# Altium PCB dc_power_module_v1.PcbDoc (part 1 of 4)
Units mm, origin at the board's own origin, x right, y up, seen from the top; angles counter-clockwise.
Board outline 83.82 x 73.41 mm, 2 copper layers (Top Layer, Bottom Layer); 37 components, 20 nets, 131 pads, 21 vias.
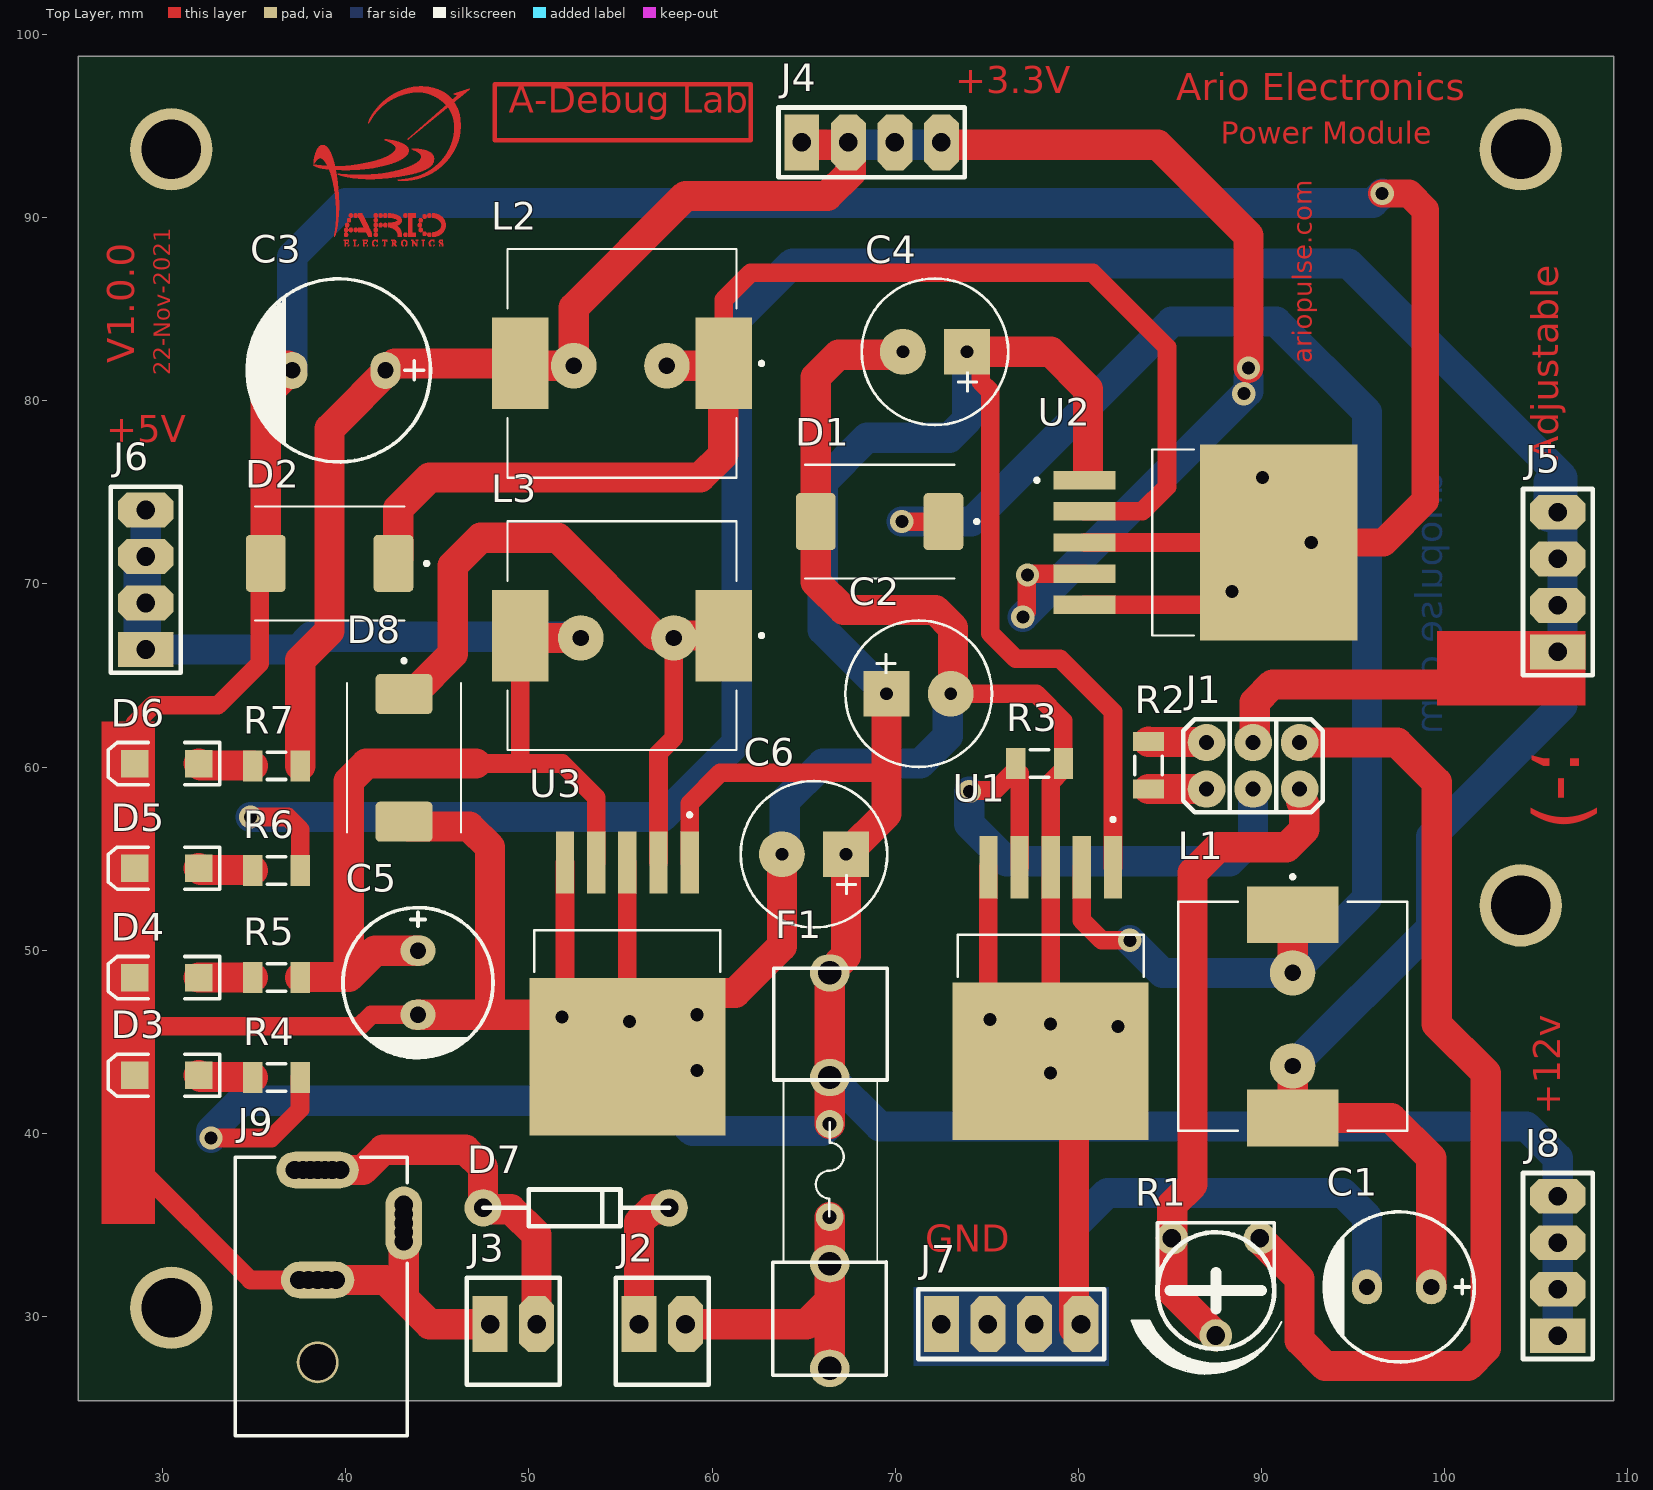
[diagram p0: Top Layer view]
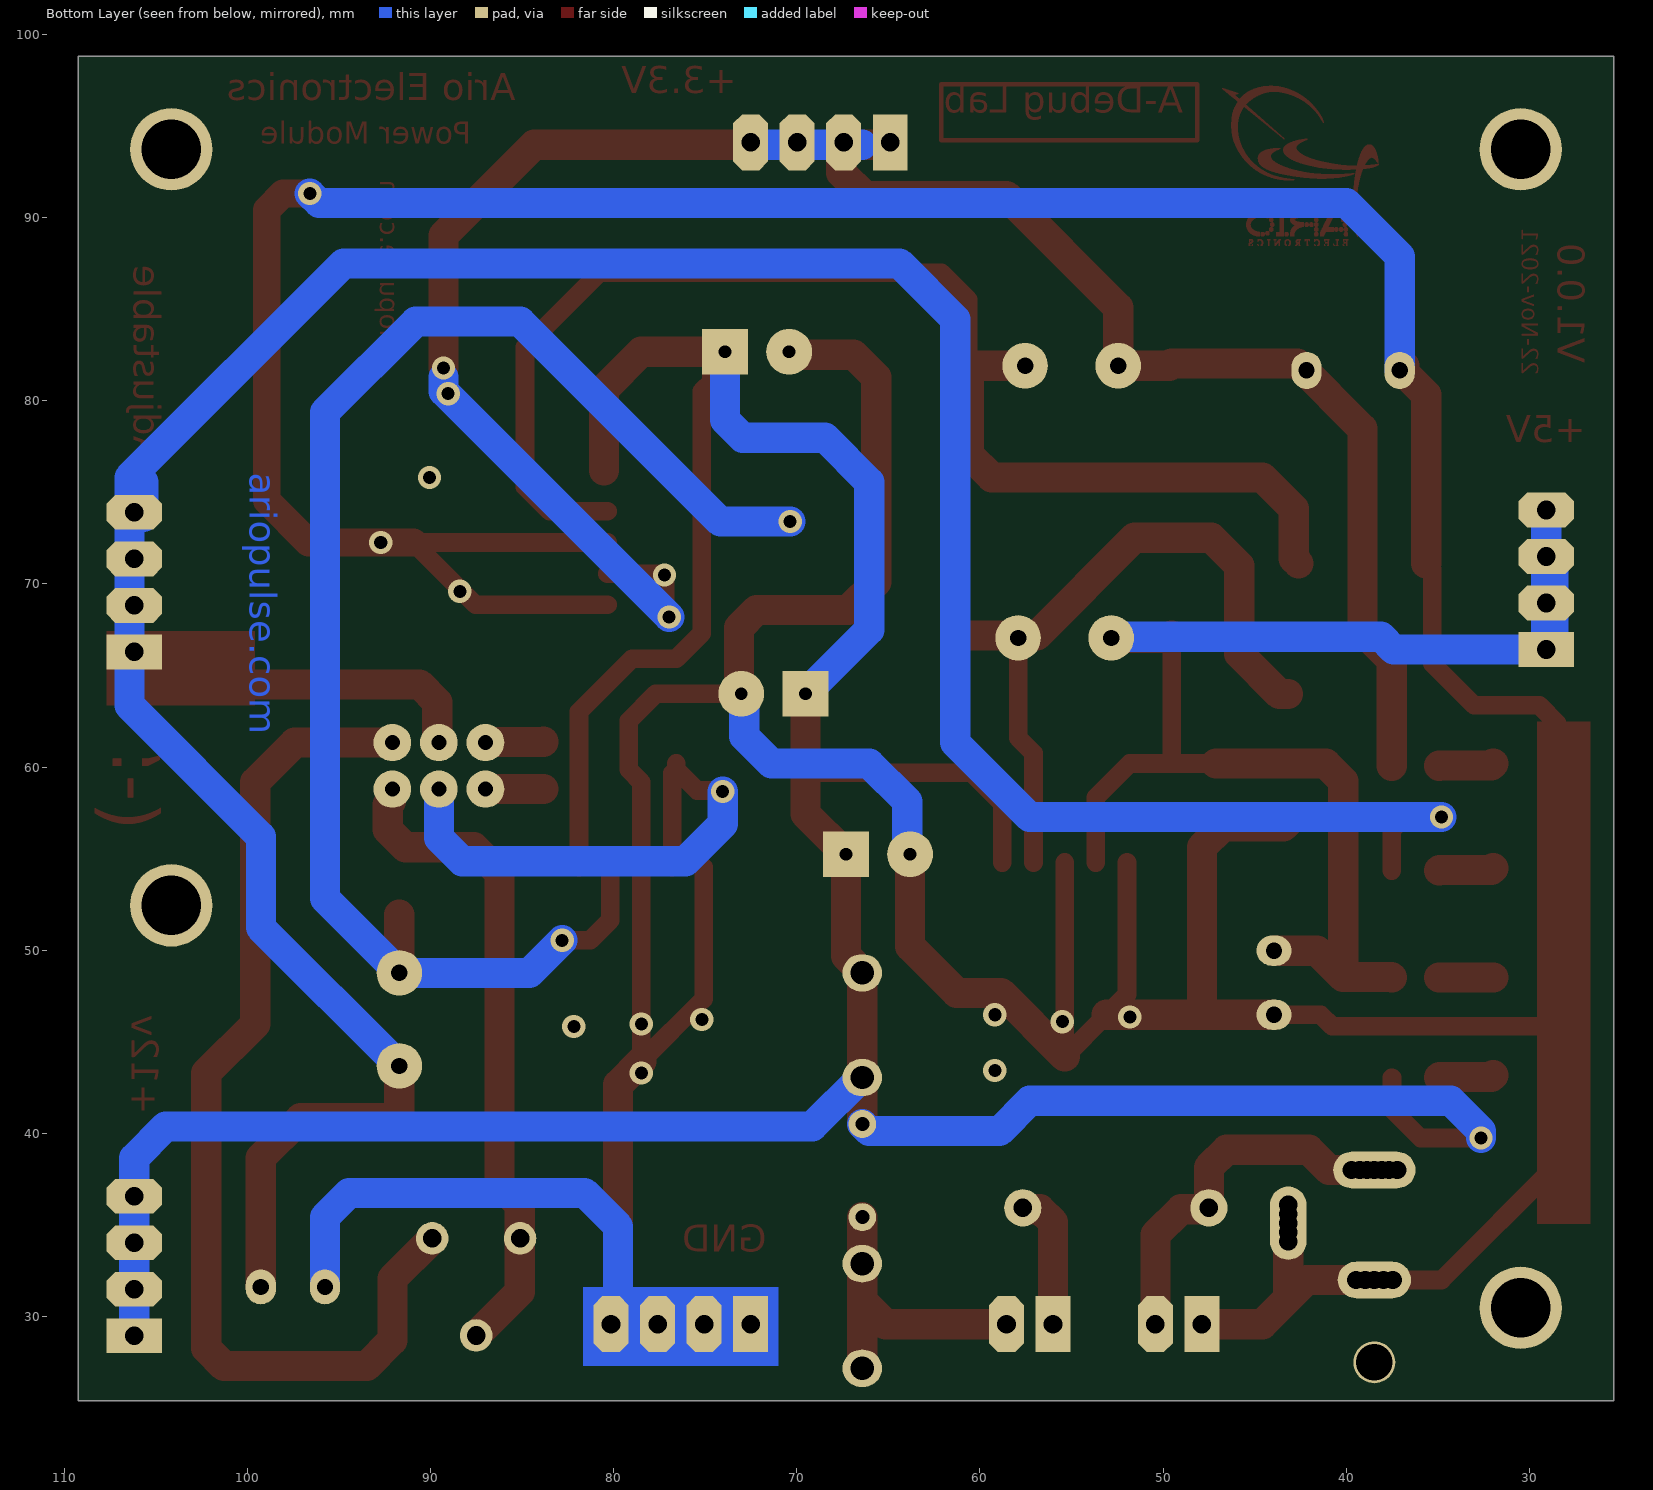
[diagram p1: Bottom Layer view, seen from below]

## Layer stack, top to bottom
Top Solder: solder mask 0.0102, Solder Resist, Dk 3.5
Top Layer: signal copper 0.0356
Dielectric 1: dielectric 0.32, FR-4, Dk 4.8
Bottom Layer: signal copper 0.0356
Bottom Solder: solder mask 0.0102, Solder Resist, Dk 3.5

## Board outline
25.4,25.4 25.4,98.806 109.22,98.806 109.22,25.4

## Design rules (kind name [scope] priority, off if disabled: settings)
Clearance [All] p1: gap=0.381 ignorepadtopadclearanceinfootprint=FALSE except(0: Arc-Hole Track-Hole SMDPad-Hole THPad-Hole Via-Hole Fill-Hole Poly-Hole Region-Hole Text-Hole; 0.254: Arc-Arc Arc-Track Arc-SMDPad Track-Track Track-SMDPad SMDPad-SMDPad)
PolygonConnect [All] p1: connectstyle=Relief reliefconductorwidth=0.254 reliefentries=4 polygonreliefangle="90 Angle" airgapwidth=0.254
RoutingVias [All] p1: holewidth=0.711 width=1.27 viastyle="Through Hole" minholewidth=0.711 minwidth=1.27 maxholewidth=0.711 maxwidth=1.27
SolderMaskExpansion [All] p1: expansion=0.102 istentingtop=FALSE
Width [All] p1: maxlimit=1.651 minlimit=1.016 preferedwidth=1.651 toplayer_prefwidth=1.016 bottomlayer_minwidth=1.651 minimp=50.000000 maximp=50.000000 favimp=50.000000
30 further rules are at their usual default settings.

## Classes and differential pairs
component class dc_power_module_v1: C1 C2 C3 C4 C5 C6 D1 D2 D3 D4 D5 D6 D7 D8 F1 J1 J2 J3 L1 L2 L3 R1 R2 R3 R4 R5 R6 R7 U1 U2 U3

## Components (designator, comment, footprint, x,y, rotation, side; value= is the part's Value field where it differs from the comment)
C1 "Cap Pol2" "Cap 03" 97.508,31.623 r0 top value=680uF
C2 "Cap Pol2" "Cap - 470uF" 73.025,64.008 r180 top value=100uF
C3 "Cap Pol2" "Cap 04" 39.624,81.661 r0 top value=1000uF
C4 "Cap Pol2" "Cap - 470uF" 70.414,82.677 r0 top value=100uF
C5 "Cap Pol2" "Cap 03" 43.942,48.232 r90 top value=680uF
C6 "Cap Pol2" "Cap - 470uF" 63.81,55.245 r0 top value=100uF
D1 "SS34" DIOM7959X262N 69.144,73.406 r180 top
D2 "SS34" DIOM7959X262N 39.116,71.12 r180 top
D3 "LED1" "LED SMD 1206" 30.226,43.18 r180 top
D4 "LED1" "LED SMD 1206" 30.226,48.514 r180 top
D5 "LED1" "LED SMD 1206" 30.226,54.483 r180 top
D6 "LED1" "LED SMD 1206" 30.226,60.198 r180 top
D7 "1n4007" DIODE_4001 47.498,35.941 r0 top
D8 "SS34" DIOM7959X262N 43.18,60.508 r270 top
F1 "FUSE" "Fuse - Complex" 66.421,37.973 r90 top
J1 "JUMPER6" JUMP6 86.995,58.801 r90 top
J2 "KEY" SIP2 56.007,29.591 r0 top
J3 "INPUT" SIP2 47.879,29.591 r0 top
J4 "Comment" SIP4 64.897,94.107 r0 top
J5 "Comment" SIP4 106.172,66.294 r90 top
J6 "Comment" SIP4 29.083,66.421 r90 top
J7 "Comment" SIP4 72.517,29.591 r0 top
J8 "Comment" SIP4 106.172,28.956 r90 top
J9 "Comment" "Power Jack" 38.465,23.504 r90 top
L1 "68uH" *IND_SRP1265A-330M 91.694,46.393 r270 top
L2 "68uH" *IND_SRP1265A-330M 55.08,82.042 r180 top
L3 "68uH" *IND_SRP1265A-330M 55.08,67.183 r180 top
R1 "POT" "Pot 00" 87.503,31.623 r180 top value=50K
R2 "Res-1206" "RES 1206" 83.82,58.801 r90 top value=2.7K
R3 "Res-1206" "RES 1206" 79.177,60.198 r180 top value=1.2K
R4 "Res-1206" "RES 1206" 34.925,43.053 r0 top value=560
R5 "Res-1206" "RES 1206" 34.925,48.514 r0 top value=220K
R6 "Res-1206" "RES 1206" 34.925,54.356 r0 top value=180K
R7 "Res-1206" "RES 1206" 34.925,60.071 r0 top value=100
U1 "LM2576-ADJ" VREG_TPS79625KTTR 78.486,43.942 r270 top
U2 "LM2576-3.3" VREG_TPS79625KTTR 90.932,72.263 r0 top
U3 "LM2576-3.3" VREG_TPS79625KTTR 55.372,44.196 r270 top

## Footprints (in the part's own frame and the unit in brackets; to place one, negate y for a bottom-side part, rotate by r counter-clockwise, add the part's x,y. Pads: shape width x height; smd on the part's side, far side on the other; paste and mask are expansions set on the pad)
*IND_SRP1265A-330M [mm]
  rect 3.1x5 smd: 1(-5.55,0) 2(5.55,0)
  silkscreen extent -7.72,-6.25 6.25,6.25
"Cap 03" [mil]
  oval 65x75 hole 35: 1(68.9,0) 2(-68.9,0)
  silkscreen extent -161,-161 161,161, body extent -159,-159 157,158, height 473
"Cap 04" [mil]
  oval 65x80 hole 35: 1(100,0) 2(-100,0)
  silkscreen extent -197,-197 197,197, body extent -198,-197 198,199, height 513
"Cap - 470uF" [mm]
  rect 2.5x2.5 hole 0.7: 1(3.5,0)
  round 2.5 hole 0.7: 2(0,0)
  silkscreen extent -2.25,-4 5.75,4
DIODE_4001 [mil]
  round 80 hole 40: 1(0,0) 2(400,0)
  silkscreen extent 0,-39 400,39
DIOM7959X262N [mm]
  rrect23% 2.18x3.12 smd: A(3.485,0) C(-3.485,0)
  silkscreen extent -5.4,-3.11 4.07,3.11
"Fuse - Complex" [mil]
  oval 80x85 hole 50: 1(-425,0) 1(-200,0) 2(200,0) 2(425,0)
  round 60 hole 30: 1(-100,0) 2(100,0)
  silkscreen extent -440,-124 435,123, body extent -434,-121 436,125, height 378
JUMP6 [mil]
  oval 80x81 hole 32: 1(0,0) 2(100,0) 3(0,-100) 4(100,-100) 5(0,-200) 6(100,-200)
  silkscreen extent -50,-250 150,50
"LED SMD 1206" [mm]
  rect 1.5x1.5 smd: 1(-1.75,0) 2(1.75,0)
  silkscreen extent -2.9,-1.15 3.2,1.15, body extent -1.65,-0.76 1.65,0.69, height 1.36
"Pot 00" [mil]
  round 70 hole 40: 1(-94.49,-104.33) 2(94.49,-104.33) 3(0,104.33)
  silkscreen extent -141,-138 181,187, body extent -125,-144 127,145, height 183
"Power Jack" [mm] "Power Adaptor Jack"
  round 1.5 hole 1: 1(14.5,-1.25) 1(14.5,-0.8) 1(14.5,-0.4) 1(14.5,0.4) 1(14.5,0.8) 1(14.5,1.25) 2(8.5,-1) 2(8.5,1) 2(8.5,-0.5) 2(8.5,0.5) 3(10.6,-4.7) 3(11.1,-4.7) 3(12.1,-4.7) 3(12.6,-4.7)
  oval 2x4.5 hole 1: 1(14.5,0)
  oval 2x4 hole 1: 2(8.5,0)
  oval 4x2 hole 1: 3(11.6,-4.7)
  round 2.286 hole 2: MH(4,0)
  silkscreen extent 0,-4.9 15.2,4.5, body extent 0,-4.9 15.2,4.5, height 11
"RES 1206" [mm] "Chip Resistor, 2-Leads, Body 3.2x1.6mm, IPC High Density _ (0.125 W)"
  rect 1.05x1.7 smd: 1(0,0) 2(2.596,0)
  silkscreen extent 0.8,-0.75 1.8,0.75, body extent -0.23,-0.76 2.82,0.76, height 0.6
SIP2 [mil]
  rect 75x120 hole 40: 1(0,0)
  oct 75x120 hole 40: 2(100,0)
  silkscreen extent -50,-130 150,100
SIP4 [mil]
  rect 75x120 hole 40: 1(0,0)
  oct 75x120 hole 40: 2(100,0) 3(200,0) 4(300,0)
  silkscreen extent -50,-75 350,75
VREG_TPS79625KTTR [mm]
  rect 3.4x1 smd paste-3 mask+0: 1(-10.6,3.4) 2(-10.6,1.7) 3(-10.6,0) 4(-10.6,-1.7) 5(-10.6,-3.4)
  rect 8.6x10.7 smd paste-6 mask+0: 6(0,0)
  silkscreen extent -13.3,-5.08 -4.62,5.08

## Part data
C1 C2 C3 C4 C5 C6: "Polarized Capacitor (Axial)", LatestRevisionDate=17-Jul-2002, LatestRevisionNote="Re-released for DXP Platform.", PackageDescription="Polarized Capacitor; 2 Leads", PackageReference=POLAR0.8, Published=8-Jun-2000, Publisher="Altium Limited"
D1 D2 D8: library part SS34-E3/57T, "Diode Schottky 40V 3A Surface Mount DO-214AB _SMC_", Package="DO-214 Vishay", Availability=Unavailable, MF=Vishay, MP=SS34-E3/57T, Price=None, SnapEDA_Link=https://www.snapeda.com/parts/SS34-E3/57T/Vishay%20Semiconductor%20Diodes%20Division/view-part/104253/?ref=snap
D3 D4 D5 D6: "Typical RED GaAs LED", LatestRevisionDate=08-Jul-2005, LatestRevisionNote="Mech Layer 1 removed.", PackageDescription="LED; 2 Leads", PackageReference=LED-1, Published=8-Jun-2000, Publisher="Altium Limited"
D7: library part DIOD, "Rectifire Diode"
J1: "Ju,per & dip Switch"
J2 J3: library part 2PIN
L1 L2 L3: library part SRP1265A-330M, "Inductor Power Shielded Wirewound 33uH 20% 100KHz Carbonyl Powder 8A 58mOhm DCR Automotive T/R", Package="1008 Bourns", Availability=Unavailable, MF=Bourns, MP=SRP1265A-330M, Price=None, SnapEDA_Link=https://www.snapeda.com/parts/SRP1265A-330M/Bourns/view-part/?ref=snap
R1: library part RPot, "Volume Potentiometer", LatestRevisionDate=17-Jul-2002, LatestRevisionNote="Re-released for DXP Platform.", PackageDescription="Variable Resistor, Thru-Hole; 3 Leads", PackageReference=VR5, Published=8-Jun-2000, Publisher="Altium Limited", Set Position=0.5, Sim Note="Enter the Resistance value and the set point into parameter fields."
R2 R3 R4 R5 R6 R7: "Resistor", LatestRevisionDate=17-Jul-2002, LatestRevisionNote="Re-released for DXP Platform.", PackageDescription="Axial Device, Thru-Hole; 2 Leads; 0.3 in Pin Spacing", PackageReference=AXIAL-0.3, Published=8-Jun-2000, Publisher="Altium Limited"
U1 U2 U3: library part LM2576HVS-ADJ/NOPB, "SWITCHER Ø³Ø§Ø¯Ù‡ Ùˆ regØ› ØªÙ†Ø¸ÛŒÙ… Ú©Ù†Ù†Ø¯Ù‡ Ú¯Ø§Ù… Ø¨Ù‡ Ù¾Ø§ÛŒÛŒÙ† ØªØ¹Ø¯Ø§Ø¯ 4 ÙˆÙ„Øª ØªØ§ 60 ÙˆÙ„Øª ØŒ 3A Ú©Ù… Ú©Ø§Ù…Ù¾ÙˆÙ†Ù†Øª 5-DDPAK / TO-263 -40 ØªØ§ 125", Package="TO-263-5 Texas Instruments", Availability=Unavailable, BuyPart=https://www.snapeda.com/parts/LM2576HVS-ADJ/NOPB/Texas%20Instruments/view-part/213619/?ref=eda, MF="Texas Instruments", MP=LM2576HVS-ADJ/NOPB, Price=None, SnapEDA_Link=https://www.snapeda.com/parts/LM2576HVS-ADJ/NOPB/Texas%20Instruments/view-part/213619/?ref=snap, Texas_Instruments-Purchase-URL=https://snapeda.com/shop?store=Texas+Instruments&id=213619

## Free pads (board coordinates)
  round 4.5 hole 3.25: 0(30.48,30.48) 0(30.48,93.726) 0(104.14,52.451) 0(104.14,93.726)
  round 2.489 hole 0.889: 6(52.451,81.915) 6(52.832,67.056) 6(91.694,43.688) 7(57.531,81.915) 7(57.912,67.056) 7(91.694,48.768)

## Via types
v1: diameter 1.27, hole 0.711, Top Layer to Bottom Layer, 21 vias

## Nets (pads, with @x,y where several pads share a name; then routed paths per layer and width w, separated by ;. In a path a pad name is that pad's centre, name@x,y a point inside that pad or via, vN(x,y) a via of type N, cw(c..) or ccw(c..) an arc to the next point about the centre after c; other vN are vias at no path point)
+3.3V: C3.1 J4.1 J4.2 J4.3 J4.4 L2.2 pad.6@52.451,81.915 R7.2 U2.4 | length 113.5
  Top Layer w1.016: v1(76.962,68.199) 76.962,68.268 77.167,68.473 77.167,70.436 v1(77.216,70.485) 77.294,70.563 U2.4@80.332,70.563
  Top Layer w1.651: R7.2@37.521,60.071 37.521,65.842 39.116,67.437 39.116,78.486 42.672,82.042 L2.2@49.53,82.042 49.657,81.915 pad.6@52.451,81.915 52.451,85.09 58.547,91.186 66.294,91.186 67.564,92.456 67.564,93.98 J4.2@67.437,94.107 ; J4.1@64.897,94.107 64.897,93.98 66.421,93.98 ; J4.4@72.517,93.98 84.328,93.98 89.281,89.027 v1(89.281,81.788)
  Bottom Layer w1.651: 66.421,93.98 71.501,93.98 ; v1(76.962,68.199) 89.281,80.518 v1@89.281,81.28
  other v1: 89.027,80.391
+5V: C5.1 J6.1 J6.2 J6.3 J6.4 L3.2 pad.6@52.832,67.056 R5.2 U3.4 | length 81.5
  Top Layer w1.016: 47.117,60.198 49.53,60.198 ; L3.2@49.53,67.183 49.53,60.198 ; U3.4@53.672,54.796 53.672,58.342 51.816,60.198 49.53,60.198
  Top Layer w1.651: R5.2@37.521,48.514 37.546,48.539 40.157,48.539 ; C5.1@43.942,49.982 41.6,49.982 40.157,48.539 ; 47.117,60.198 41.124,60.198 40.157,59.231 40.157,48.539 ; L3.2@49.53,67.183 49.657,67.056 pad.6@52.832,67.056
  Bottom Layer w1.651: J6.1@28.702,67.183 J6.2@28.702,68.961 ; J6.2@28.702,69.723 J6.3@28.702,71.501 ; J6.4@29.083,74.041 J6.3@29.083,71.501 J6.2@29.083,68.961 J6.1@29.083,66.421 37.401,66.421 38.1,67.12 52.768,67.12 pad.6@52.832,67.056
+12V: C2.1 C4.1 C6.1 F1.2 J8.1 J8.2 J8.3 J8.4 R4.2 U1.1 U2.1 U3.1 | length 204.5
  Top Layer w1.016: v1(32.639,39.751) 35.941,39.751 37.504,41.314 37.504,43.036 R4.2@37.521,43.053 ; U3.1@58.772,54.796 58.78,54.804 58.78,58.018 60.452,59.69 69.525,59.69 ; C4.1@73.914,82.677 74.656,81.935 74.656,81.046 75.184,80.518 75.184,67.31 76.581,65.913 78.994,65.913 81.886,63.021 U1.1@81.886,54.542
  Top Layer w1.651: F1.2@66.421,40.513 F1.2@66.421,43.053 F1.2@66.421,48.768 66.421,48.808 67.31,49.697 C6.1@67.31,55.245 69.525,57.46 69.525,59.69 C2.1@69.525,64.008 ; C4.1@73.914,82.677 78.486,82.677 80.518,80.645 80.518,76.2
  Bottom Layer w1.651: v1(32.639,39.751) 32.639,40.132 34.29,41.783 57.277,41.783 58.928,40.132 66.04,40.132 F1.2@66.421,40.513 ; F1.2@66.421,43.053 66.484,43.053 69.151,40.386 104.443,40.386 106.172,38.657 J8.4@106.172,36.576 J8.3@106.172,34.036 J8.2@106.172,31.496 J8.1@106.172,28.956 ; C2.1@69.525,64.008 66.04,67.493 66.04,75.565 68.453,77.978 72.947,77.978 73.914,78.945 C4.1@73.914,82.677 ; J8.1@105.664,28.829 J8.1@105.664,28.956
GND: C1.2 C2.2 C3.2 C4.2 C5.2 C6.2 D1.A D2.A D3.2 D4.2 D5.2 D6.2 D8.A J3.1 J7.1 J7.2 J7.3 J7.4 J9.2 J9.3 R3.1 U1.3 U1.5 U1.6 U2.3 U2.5 U2.6 U3.3 U3.5 U3.6 | length 402.8
  Top Layer w1.016: D3.2@28.476,43.18 28.476,38.326 34.798,32.004 J9.2@37.465,32.004 ; 28.476,45.974 28.603,45.847 40.767,45.847 41.402,46.482 C5.2@43.942,46.482 ; D6.2@28.476,60.198 28.476,62.385 29.464,63.373 33.02,63.373 35.306,65.659 35.306,70.795 D2.A@35.631,71.12 ; U3.5@51.972,54.796 51.972,47.596 53.086,46.482 U3.6@55.372,44.196 U3.3@55.372,54.796 ; C2.2@73.025,64.008 77.693,64.008 79.177,62.524 R3.1@79.177,60.198 79.177,59.873 78.486,59.182 U1.3@78.486,54.542 U1.6@78.486,43.942 75.086,47.342 U1.5@75.086,54.542 ; U2.5@80.332,68.863 87.532,68.863 U2.6@90.932,72.263 U2.3@80.332,72.263
  Top Layer w1.524: U2.6@90.932,72.263 96.647,72.263 98.933,74.549 98.933,90.42 98.04,91.313 v1(96.582,91.313)
  Top Layer w1.651: D3.2@28.476,43.18 28.476,45.974 D4.2@28.476,48.514 D5.2@28.476,54.483 D6.2@28.476,60.198 ; D2.A@35.631,71.12 35.631,80.335 36.957,81.661 36.957,81.788 C3.2@36.83,81.915 ; J9.2@37.465,32.004 J9.2@38.465,32.004 J9.2@39.465,32.004 42.164,32.004 43.165,31.003 ; J9.3@43.165,35.604 J9.3@43.165,35.104 J9.3@43.165,34.604 J9.3@43.165,34.104 43.165,31.003 ; D8.A@43.18,57.023 43.445,56.758 46.747,56.758 47.879,55.626 47.879,46.482 ; C5.2@43.942,46.482 47.879,46.482 ; J3.1@47.879,29.591 44.577,29.591 43.165,31.003 ; U3.6@53.086,46.482 47.879,46.482 ; U3.6@55.372,44.196 58.847,47.671 61.26,47.671 63.81,50.221 C6.2@63.81,55.245 ; C4.2@70.414,82.677 70.252,82.515 66.894,82.515 65.659,81.28 D1.A@65.659,73.406 65.659,70.104 67.183,68.58 72.185,68.58 73.152,67.613 73.152,64.135 C2.2@73.025,64.008 ; U1.6@78.486,43.942 79.756,42.672 J7.4@79.756,29.337
  Bottom Layer w1.651: C3.2@37.084,81.661 37.084,87.884 40.005,90.805 96.074,90.805 v1(96.582,91.313) ; C6.2@63.81,55.245 63.972,55.407 63.972,58.13 66.04,60.198 71.374,60.198 72.863,61.687 72.863,63.846 C2.2@73.025,64.008 ; J7.1@73.406,29.337 J7.2@75.946,29.337 ; J7.2@75.057,29.337 J7.2@75.946,29.337 ; J7.3@78.486,29.337 J7.2@75.946,29.337 ; 78.867,29.337 79.756,29.337 79.756,34.925 81.583,36.752 94.439,36.752 95.758,35.433 C1.2@95.758,31.623
  other v1: 78.486,43.307 59.182,43.434 82.169,45.847 78.486,45.974 55.499,46.101 75.184,46.228 51.816,46.355 59.182,46.482 88.392,69.596 92.71,72.263 90.043,75.819
NetD1_C: D1.C L1.1 pad.7@91.694,48.768 U1.2 | length 85.3
  Top Layer w1.016: v1(70.358,73.406) D1.C@72.629,73.406 ; U1.2@80.186,54.542 80.186,51.64 81.28,50.546 v1(82.804,50.546)
  Top Layer w1.651: pad.7@91.694,48.768 L1.1@91.694,51.943
  Bottom Layer w1.651: v1(70.358,73.406) 74.168,73.406 85.09,84.328 90.805,84.328 95.758,79.375 95.758,52.832 pad.7@91.694,48.768 84.582,48.768 v1(82.804,50.546)
NetD2_C: D2.C L2.1 pad.7@57.531,81.915 U2.2 | length 72.8
  Top Layer w1.016: L2.1@60.63,82.042 60.63,85.522 62.103,86.995 80.772,86.995 84.836,82.931 84.836,75.311 83.488,73.963 U2.2@80.332,73.963
  Top Layer w1.651: D2.C@42.601,71.12 42.865,71.385 42.865,74.107 44.577,75.819 59.358,75.819 60.604,77.065 L2.1@60.604,82.016 ; pad.7@57.531,81.915 60.503,81.915 L2.1@60.604,82.016 ; L2.1@60.63,82.042 L2.1@60.604,82.016
NetD3_1: D3.1 R4.1 | length 3
  Top Layer w1.651: D3.1@31.976,43.18 32.078,43.078 34.9,43.078 R4.1@34.925,43.053
NetD4_1: D4.1 R5.1 | length 2.9
  Top Layer w1.651: D4.1@31.976,48.514 R5.1@34.925,48.514
NetD5_1: D5.1 R6.1 | length 3
  Top Layer w1.651: D5.1@31.976,54.483 32.078,54.381 34.9,54.381 R6.1@34.925,54.356
NetD6_1: D6.1 R7.1 | length 3
  Top Layer w1.651: D6.1@31.976,60.198 32.078,60.096 34.9,60.096 R7.1@34.925,60.071
NetD7_1: D7.1 J3.2 J9.1 | length 21.3
  Top Layer w1.651: J9.1@37.665,38.004 J9.1@38.065,38.004 J9.1@38.465,38.004 J9.1@38.865,38.004 J9.1@39.265,38.004 J9.1@39.715,38.004 40.925,38.004 42.037,39.116 46.531,39.116 47.498,38.149 D7.1@47.498,35.941 47.571,35.868 49.017,35.868 50.419,34.466 J3.2@50.419,29.591
NetD8_C: D8.C L3.1 pad.7@57.912,67.056 U3.2 | length 38.6
  Top Layer w1.016: U3.2@57.072,54.796 57.072,60.755 57.912,61.595 pad.7@57.912,67.056
  Top Layer w1.651: D8.C@43.18,63.993 43.65,63.993 45.847,66.19 45.847,70.993 47.371,72.517 51.562,72.517 56.896,67.183 L3.1@60.63,67.183
NetF1_1: F1.1 J2.2 | length 16.7
  Top Layer w1.651: J2.2@58.547,29.591 65.151,29.591 66.421,30.861 ; F1.1@66.421,27.178 66.421,30.861 ; F1.1@66.421,35.433 F1.1@66.421,32.893 66.421,30.861
NetJ1_1: J1.1 R2.1 | length 3.2
  Top Layer w1.651: R2.1@83.82,58.801 J1.1@86.995,58.801
NetJ1_2: J1.2 R2.2 | length 3.2
  Top Layer w1.651: R2.2@83.82,61.397 83.82,61.394 83.845,61.369 86.967,61.369 J1.2@86.995,61.341
NetJ1_3: J1.3 R3.2 U1.4 | length 30.1
  Top Layer w1.016: v1(74.041,58.674) 74.09,58.723 75.431,58.723 R3.2@76.581,59.873 ; R3.2@76.581,60.198 R3.2@76.581,59.873 ; U1.4@76.786,54.542 76.786,59.668 R3.2@76.581,59.873
  Bottom Layer w1.651: v1(74.041,58.674) 74.041,56.896 76.073,54.864 88.265,54.864 89.535,56.134 J1.3@89.535,58.801
NetJ1_5: J1.5 R1.2 R1.3 | length 36.1
  Top Layer w1.651: R1.3@87.503,28.973 87.503,28.981 85.127,31.357 85.127,34.249 R1.2@85.103,34.273 85.127,34.297 85.127,36.105 86.233,37.211 86.233,54.229 87.63,55.626 91.362,55.626 92.329,56.593 92.329,57.961 92.161,58.129 92.161,58.715 J1.5@92.075,58.801
NetJ1_6: J1.6 R1.1 | length 58
  Top Layer w1.651: R1.1@89.903,34.273 89.903,34.239 92.075,32.067 92.075,28.702 93.472,27.305 101.268,27.305 102.235,28.272 102.235,43.307 99.568,45.974 99.568,59.182 97.409,61.341 J1.6@92.075,61.341
VADJ: C1.1 J1.4 J5.1 J5.2 J5.3 J5.4 L1.2 pad.6@91.694,43.688 R6.2 | length 186.2
  Top Layer w1.016: v1(34.798,57.277) 36.83,57.277 37.521,56.586 R6.2@37.521,54.356 ; J5.1@106.172,66.294 106.299,66.167 106.299,65.111
  Top Layer w1.651: J1.4@89.535,61.341 89.621,61.427 89.621,63.549 90.588,64.516 105.196,64.516 105.537,64.857 ; pad.6@91.694,43.688 L1.2@91.694,40.843 97.079,40.843 99.258,38.664 C1.1@99.258,31.623 ; J5.1@106.426,66.04 J5.1@106.441,66.055
  Bottom Layer w1.651: v1(34.798,57.277) 57.277,57.277 61.341,61.341 61.341,84.455 64.389,87.503 93.726,87.503 94.742,87.503 106.426,75.819 106.426,63.373 99.251,56.197 99.251,51.244 pad.6@91.694,43.688 ; J5.4@105.664,73.66 105.664,75.565
VIN: D7.2 J2.1 | length 7.5
  Top Layer w1.651: J2.1@56.007,29.591 56.007,35.155 56.72,35.868 57.585,35.868 D7.2@57.658,35.941
pads on no net: J9.MH
copper on no net: | length 1499